# Altium PCB VESC_POWER.PcbDoc
Units mm, origin at the board's own origin, x right, y up, seen from the top; angles counter-clockwise.
Board outline 90 x 54 mm, 2 copper layers (TOP, BOTTOM), stack 1.581 mm thick; 50 components, 22 nets, 125 pads, 0 vias.
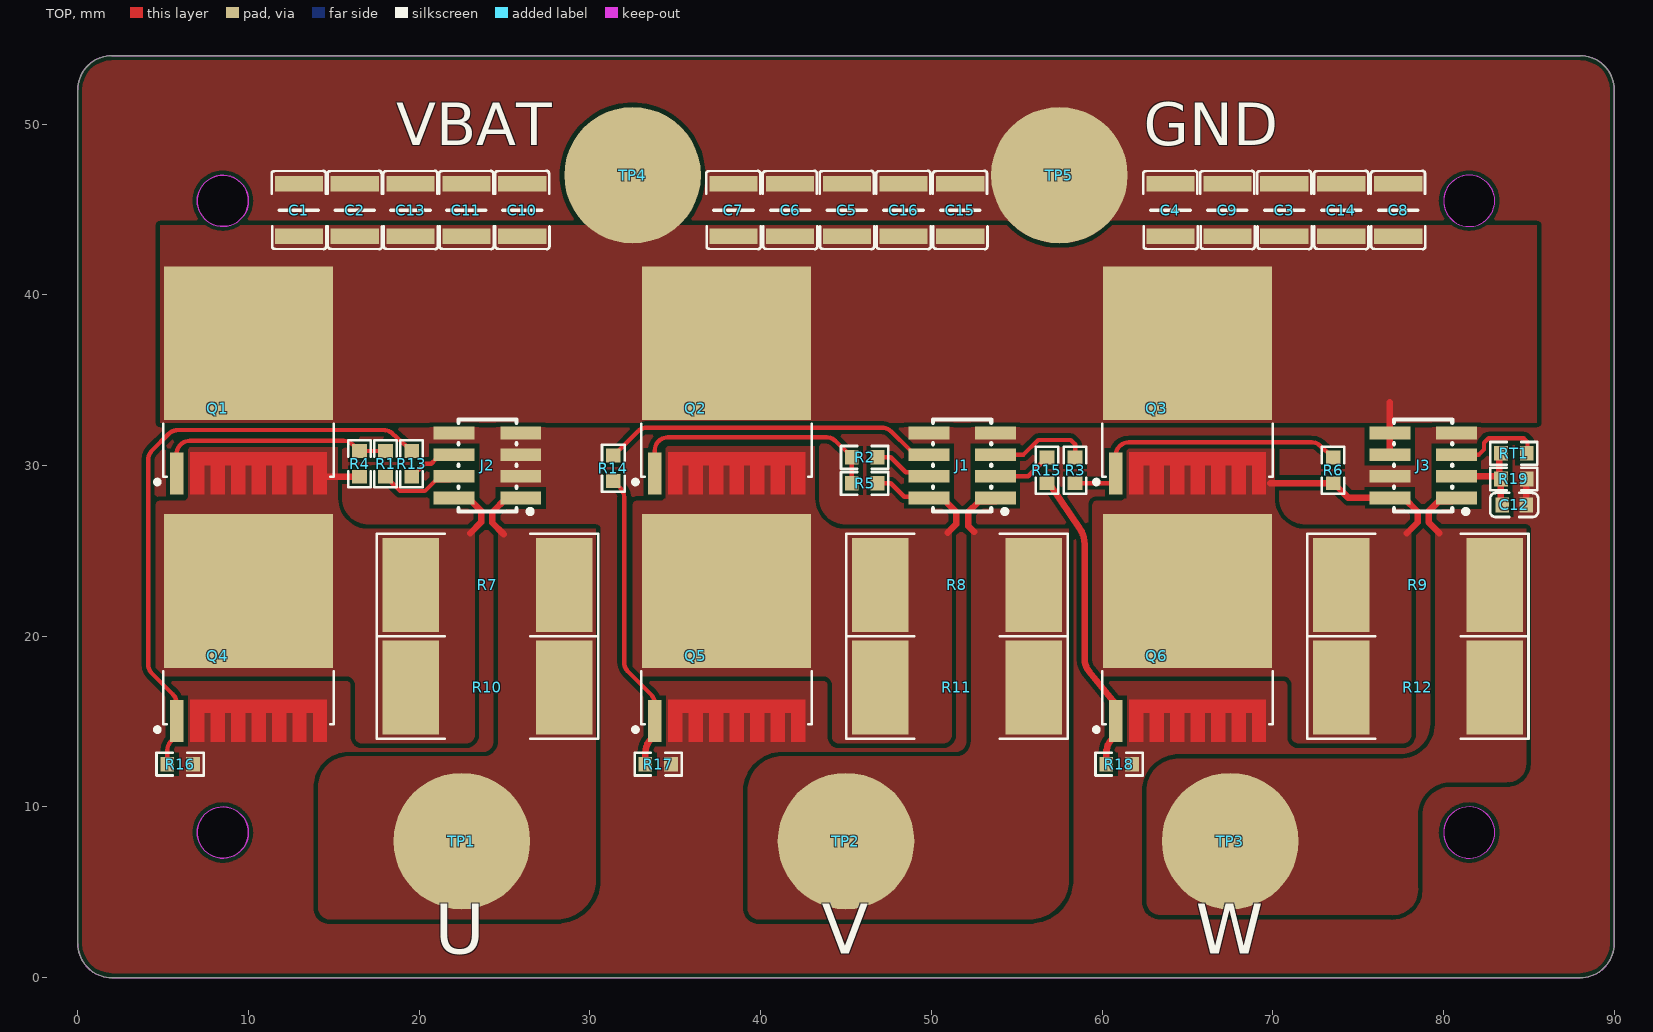
[diagram p0: TOP view]
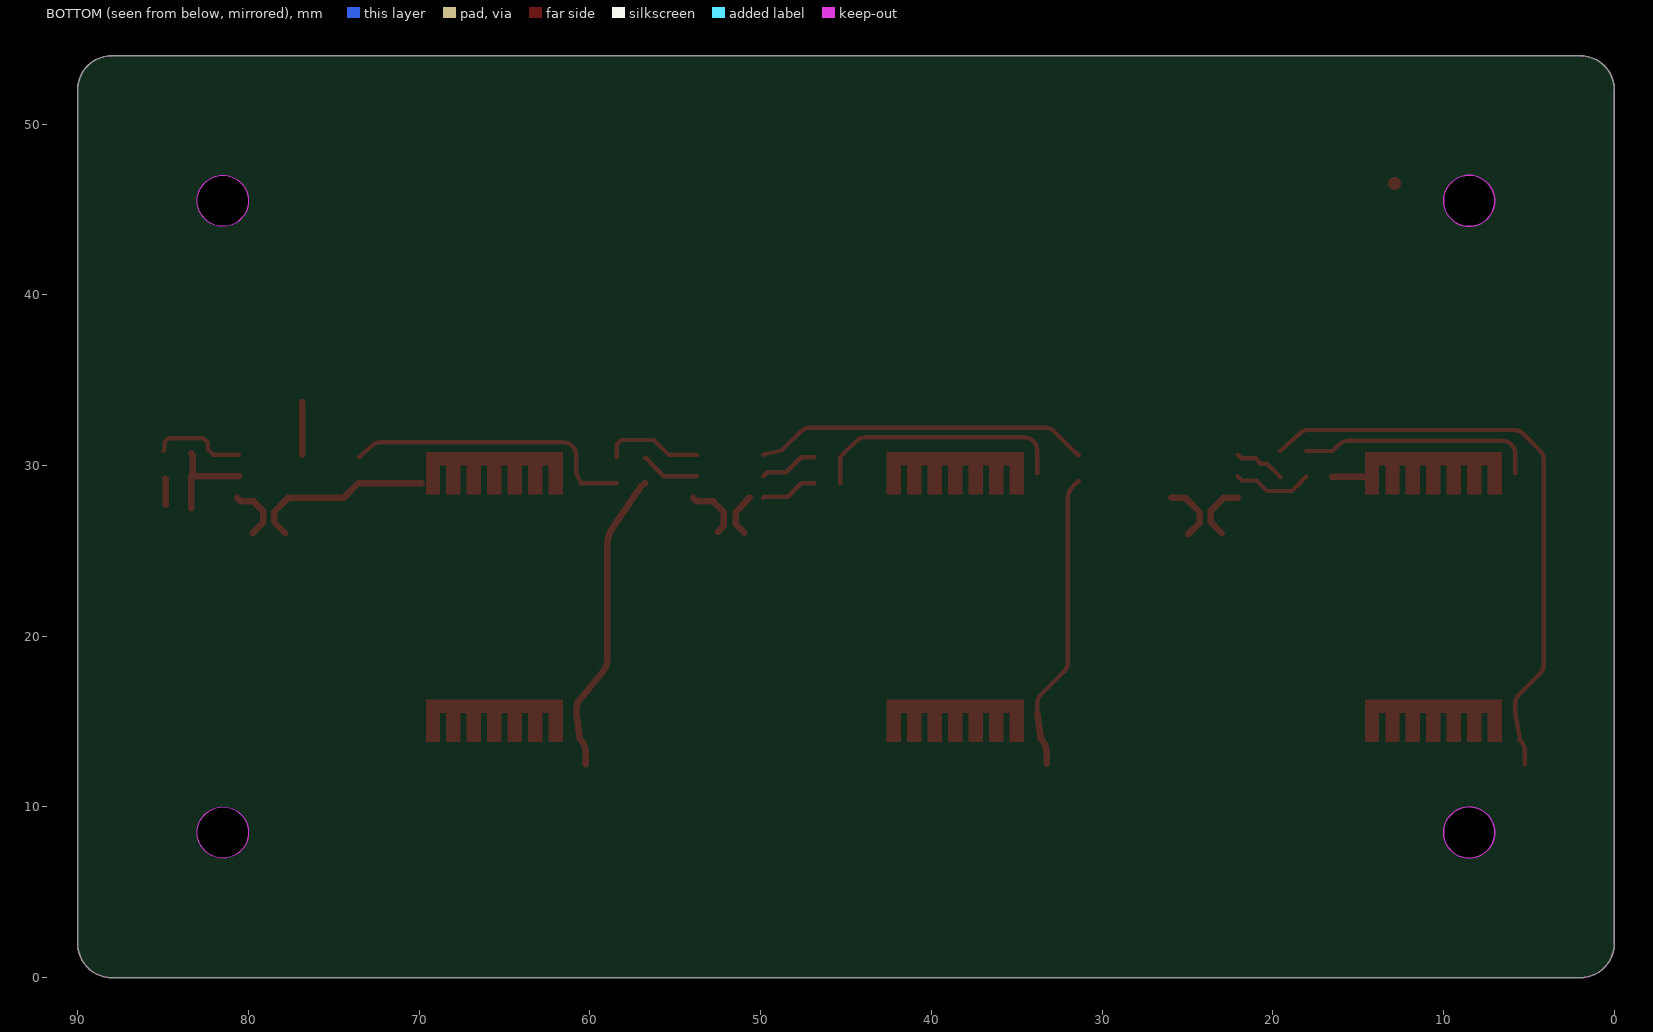
[diagram p1: BOTTOM view, seen from below]
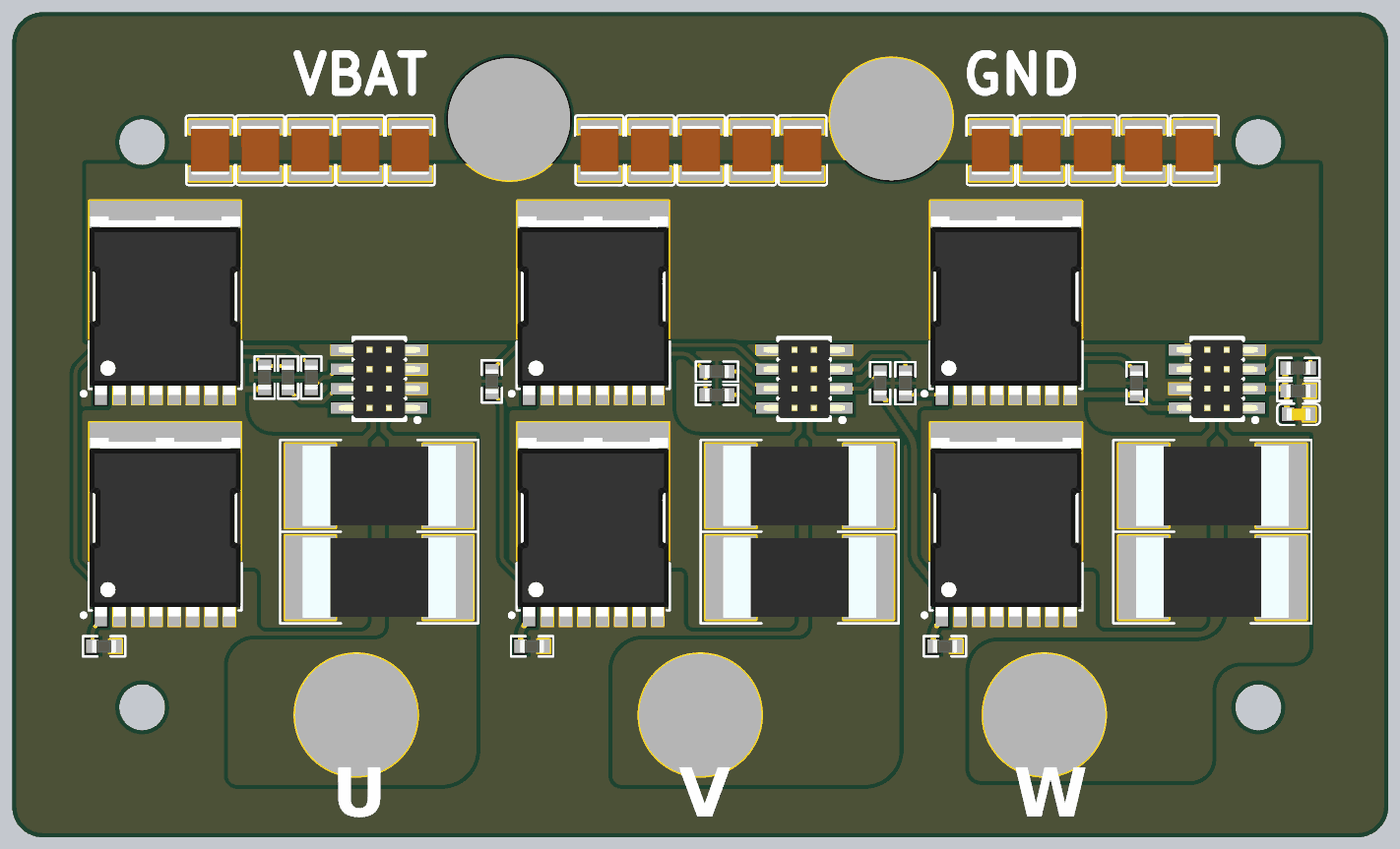
[diagram p2: 3D render of the assembled board from above, using the file's embedded part models]

## Layer stack, top to bottom
Top Solder: solder mask 0.0102, Solder Resist, Dk 3.5
TOP: signal copper 0.0305
Dielectric 1: core 1.52, FR-4, Dk 4.5
BOTTOM: signal copper 0.0305
Bottom Solder: solder mask 0.0102, Solder Resist, Dk 3.5

## Board outline
0,2 0,52 cw(c2,52) 2,54 88,54 cw(c88,52) 90,52 90,2 cw(c88,2) 88,0 2,0 cw(c2,2)
cut-out: 8.5,44 cw(c8.5,45.5) 7,45.5 cw(c8.5,45.5) 8.5,47 cw(c8.5,45.5) 10,45.5 cw(c8.5,45.5)
cut-out: 80,45.5 ccw(c81.5,45.5) 81.5,44 ccw(c81.5,45.5) 83,45.5 ccw(c81.5,45.5) 81.5,47 ccw(c81.5,45.5)
cut-out: 80,8.5 ccw(c81.5,8.5) 81.5,7 ccw(c81.5,8.5) 83,8.5 ccw(c81.5,8.5) 81.5,10 ccw(c81.5,8.5)
cut-out: 8.5,7 cw(c8.5,8.5) 7,8.5 cw(c8.5,8.5) 8.5,10 cw(c8.5,8.5) 10,8.5 cw(c8.5,8.5)

## Design rules (kind name [scope] priority, off if disabled: settings)
BoardOutlineClearance [All] p1: gap=0.254 ignorepadtopadclearanceinfootprint=FALSE except(0: Arc-SplitContinuation Track-SplitContinuation SMDPad-SplitContinuation THPad-SplitContinuation Via-SplitContinuation Fill-SplitContinuation Poly-SplitContinuation Region-SplitContinuation Text-SplitContinuation)
Clearance [All] p1: gap=0.254 ignorepadtopadclearanceinfootprint=FALSE except(0: Arc-Hole Track-Hole SMDPad-Hole THPad-Hole Via-Hole Fill-Hole Poly-Hole Region-Hole Text-Hole)
MinimumSolderMaskSliver [All] p1: minsoldermaskwidth=0.051
PlaneConnect [All] p1: planeconnectstyle=Direct reliefexpansion=0.508 reliefentries=4 reliefconductorwidth=0.254 reliefairgap=0.254
PolygonConnect [All] p1: connectstyle=Direct reliefconductorwidth=0.254 reliefentries=4 polygonreliefangle="90 Angle" airgapwidth=0.254
RoutingVias [All] p1: holewidth=0.711 width=1.27 viastyle="Through Hole" minholewidth=0.711 minwidth=1.27 maxholewidth=0.711 maxwidth=1.27
SilkToSolderMaskClearance [IsPad] p1: minsilkscreentomaskgap=0.025 clearancetoexposedcopper=TRUE
SolderMaskExpansion [All] p1: expansion=0.102 istentingtop=FALSE
SupplyNets "Schematic Supply Nets_2" [InNet('GND')] p1: voltage=0.000
SupplyNets "Schematic Supply Nets_1" [InNet('3V3')] p2: voltage=0.000
SupplyNets "Schematic Supply Nets" [InNet('VIN')] p3: voltage=0.000
Width [All] p1: maxlimit=5.08 minlimit=0.152 preferedwidth=0.254
27 further rules are at their usual default settings.

## Components (designator, comment, footprint, x,y, rotation, side; value= is the part's Value field where it differs from the comment)
C1 "2.2uF/100V" CAPC3225X230N 12.954,44.958 r270 top
C2 "2.2uF/100V" CAPC3225X230N 16.224,44.958 r270 top
C3 "2.2uF/100V" CAPC3225X230N 70.673,44.958 r270 top
C4 "2.2uF/100V" CAPC3225X230N 64.004,44.958 r270 top
C5 "2.2uF/100V" CAPC3225X230N 45.049,44.958 r270 top
C6 "2.2uF/100V" CAPC3225X230N 41.728,44.958 r270 top
C7 "2.2uF/100V" CAPC3225X230N 38.408,44.958 r270 top
C8 "2.2uF/100V" CAPC3225X230N 77.343,44.958 r270 top
C9 "2.2uF/100V" CAPC3225X230N 67.339,44.958 r270 top
C10 "2.2uF/100V" CAPC3225X230N 26.035,44.958 r270 top
C11 "2.2uF/100V" CAPC3225X230N 22.765,44.958 r270 top
C12 "2.2uF/6.3V" C0603 84.136,27.686 r0 top
C13 "2.2uF/100V" CAPC3225X230N 19.494,44.958 r270 top
C14 "2.2uF/100V" CAPC3225X230N 74.008,44.958 r270 top
C15 "2.2uF/100V" CAPC3225X230N 51.689,44.958 r270 top
C16 "2.2uF/100V" CAPC3225X230N 48.369,44.958 r270 top
J1 "X6521WVS-2x04H-C60D74" HDR-SMD_8P-P1.27-V-M-C2-C4-LS5.3 51.8,30 r90 top
J2 "X6521WVS-2x04H-C60D74" HDR-SMD_8P-P1.27-V-M-C2-C4-LS5.3 24,30 r90 top
J3 "X6521WVS-2x04H-C60D74" HDR-SMD_8P-P1.27-V-M-C2-C4-LS5.3 78.8,30 r90 top
Q1 "NCEP023N10LL" TOLL 10,35 r90 top
Q2 "NCEP023N10LL" TOLL 38,35 r90 top
Q3 "NCEP023N10LL" TOLL 65,35 r90 top
Q4 "NCEP023N10LL" TOLL 10,20.5 r90 top
Q5 "NCEP023N10LL" TOLL 38,20.5 r90 top
Q6 "NCEP023N10LL" TOLL 65,20.5 r90 top
R1 "5.1R/1%" R0603 18.034,30.099 r90 top
R2 "5.1R/1%" R0603 46.092,30.48 r180 top
R3 "5.1R/1%" R0603 58.42,29.718 r270 top
R4 "5.1K/1%" R0603 16.51,30.099 r90 top
R5 "5.1K/1%" R0603 46.092,28.956 r180 top
R6 "5.1K/1%" R0603 73.533,29.718 r90 top
R7 "1mR/1%" R3920 24,23 r180 top
R8 "1mR/1%" R3920 51.5,23 r180 top
R9 "1mR/1%" R3920 78.5,23 r180 top
R10 "1mR/1%" R3920 24,17 r180 top
R11 "1mR/1%" R3920 51.5,17 r180 top
R12 "1mR/1%" R3920 78.5,17 r180 top
R13 "5.1R/1%" R0603 19.558,30.099 r90 top
R14 "5.1R/1%" R0603 31.369,29.836 r270 top
R15 "5.1R/1%" R0603 56.769,29.718 r270 top
R16 "5.1K/1%" R0603 6,12.5 r180 top
R17 "5.1K/1%" R0603 34,12.5 r180 top
R18 "5.1K/1%" R0603 61,12.5 r180 top
R19 "10K/1%" R0603 84.116,29.212 r180 top
RT1 "NTC" R0603 84.116,30.712 r180 top
TP1 "PHA" TP_8x8 22.5,8 r0 top
TP2 "PHB" TP_8X8 45,8 r0 top locked
TP3 "PHC" TP_8x8 67.5,8 r0 top
TP4 "GND" TP_8x8 32.5,47 r0 top
TP5 "VIN" TP_8x8 57.5,47 r0 top

## Footprints (in the part's own frame and the unit in brackets; to place one, negate y for a bottom-side part, rotate by r counter-clockwise, add the part's x,y. Pads: shape width x height; smd on the part's side, far side on the other; paste and mask are expansions set on the pad)
C0603 [mm] "C0603"
  rect 0.8x0.9 smd: 1(-0.7,0) 2(0.7,0)
  silkscreen extent -1.41,-0.7 1.4,0.7, body extent -0.8,-0.41 0.8,0.41, height 0.9
CAPC3225X230N [mm]
  rect 0.92x2.82 smd: 1(-1.54,0) 2(1.54,0)
  silkscreen extent -2.3,-1.6 2.28,1.6, body extent -1.6,-1.25 1.6,1.25, height 2.47
HDR-SMD_8P-P1.27-V-M-C2-C4-LS5.3 [mm]
  rect 0.74x2.4 smd paste+0 mask+0.05: 1(-1.905,-1.95) 2(-1.905,1.95) 3(-0.635,-1.95) 4(-0.635,1.95) 5(0.635,-1.95) 6(0.635,1.95) 7(1.905,-1.95) 8(1.905,1.95)
  silkscreen extent -2.84,-2.64 2.69,1.7, body extent -2.54,-2.65 2.54,2.65, height 5.5
R0603 [mm] "R0603"
  rect 0.806x0.864 smd: 1(-0.753,0) 2(0.753,0)
  silkscreen extent -1.38,-0.66 1.39,0.66, body extent -0.79,-0.43 0.79,0.43, height 0.5
R3920 [mm] "R3920"
  rect 3.3x5.5 smd: 1(-4.5,0) 2(4.5,0)
  silkscreen extent -6.48,-3 6.48,3, body extent -5,-2.63 5,2.63, height 1.37
TOLL [mm] "TOLL"
  rect 2.463x0.8 smd: 1(-5.469,4.2)
  rect 9x9.9 smd: 2(2.15,0)
  oct 0.025x0.025 smd: 3(-5.46,-0.6)
  round 0.025 smd: 3(-5.46,-0.6)
  TOP region: -6.691,3.4 -4.228,3.4 -4.228,-4.6 -6.691,-4.6 -6.691,-3.8 -4.991,-3.8 -4.991,-3.4 -6.691,-3.4 -6.691,-2.6 -4.991,-2.6 -4.991,-2.2 -6.691,-2.2 -6.691,-1.4 -4.991,-1.4 -4.991,-1 -6.691,-1 -6.691,-0.2 -4.991,-0.2 -4.991,0.2 -6.691,0.2 -6.691,1 -4.991,1 -4.991,1.4 -6.691,1.4 -6.691,2.2 -4.991,2.2 -4.991,2.6 -6.691,2.6
  silkscreen extent -6.1,-5 -2.55,5.46, body extent -6.04,-4.95 5.63,4.95, height 2.3
TP_8x8 [mm] "TP_8X8"
  round 8 smd: 1(0,0)
TP_8X8 [mm] "TP_8X8"
  round 8 smd: 1(0,0)

## Part data
C1 C2 C3 C4 C5 C6 C7 C8 C9 C10 C11 C12 C13 C14 C15 C16: library part "CAP NP"
  C1 C2 C3 C4 C5 C6 C7 C8 C9 C10 C11 C13 C14 C15 C16: PCB Footprint=C1206
  C12: PCB Footprint=C0603
J1 J2 J3: Color=黑色, Current Rating (Max)=3A, JLCPCB Part Class="Extended Part", LCSC Part Name="2x4P 间距:2.54mm 方针", Manufacturer="XKB Connection(中国星坤)", Operating Temperature Range=-40℃~+105℃, Soldering Temperature(Max)=260℃, Voltage Rating (Max)=250V, Add into BOM=yes, Circluar Pins/Square Pins=方针, Contact Material=黄铜, Contact Plating=金, Convert to PCB=yes, Datasheet=https://atta.szlcsc.com/upload/public/pdf/source/20211009/E3239EE5247E6BAFECB8B74A4FCF9AB8.pdf, Device=X6521WVS-2x04H-C60D74, Insulation Height=2.5mm, Length of End Connection Pin=-, Length of Mating Pin=-, Manufacturer Part=X6521WVS-2x04H-C60D74, Mounting Type=-, Number of Pins=8P, Number of Rows=双排, Pin Structure=2x4P, Pitch=2.54mm, Row Spacing=2.54mm, Supplier=LCSC, Supplier Footprint=SMD,P=2.54mm, Supplier Part=C780053, Symbol=X6521WVS-2*04H-C60D74
Q1 Q2 Q3 Q4 Q5 Q6: library part "MOSFET N", PCB Footprint=TOLL
R1 R2 R3 R4 R5 R6 R7 R8 R9 R10 R11 R12 R13 R14 R15 R16 R17 R18 R19: library part RESISTOR
  R1 R2 R3 R4 R5 R6 R13 R14 R15 R16 R17 R18 R19: PCB Footprint=R0603
  R7 R8 R9 R10 R11 R12: PCB Footprint=R3920
TP1 TP2 TP3 TP4 TP5: library part "TEST POINT", PCB Footprint=TP_8x8
RT1: PCB Footprint=R0603

## Nets (pads, with @x,y where several pads share a name; then routed paths per layer and width w, separated by ;. In a path a pad name is that pad's centre, name@x,y a point inside that pad or via, vN(x,y) a via of type N, cw(c..) or ccw(c..) an arc to the next point about the centre after c; other vN are vias at no path point)
3V3: J3.5 RT1.1 | length 5.6
  TOP w0.254: J3.5@80.55,30.635 82.07,30.635 82.369,30.934 82.369,31.329 82.639,31.6 84.691,31.6 84.915,31.376 84.915,30.909 RT1.1@84.963,30.861
ADC_TEMP: C12.1 J3.3 R19.2 RT1.2 | length 6
  TOP w0.381: J3.3@80.55,29.365 83.21,29.365 R19.2 C12.1@83.363,27.492 ; R19.2@83.344,29.365 83.255,29.453 83.255,30.604 RT1.2
GHA: J2.4 R1.1 | length 4.7
  TOP w0.254: R1.1 18.063,29.346 18.339,29.07 18.339,29.041 18.878,28.502 20.334,28.502 20.955,29.122 21.807,29.122 J2.4
GHB: J1.4 R2.1 | length 3.5
  TOP w0.254: R2.1 47.625,30.48 48.497,29.608 49.607,29.608 J1.4
GHC: J1.5 R3.1 | length 5.9
  TOP w0.254: J1.5 55.4,30.635 56.261,31.496 58.166,31.496 58.42,31.242 R3.1
GLA: J2.6 R13.1 | length 3
  TOP w0.254: R13.1 19.587,29.346 20.34,30.099 20.701,30.099 20.977,30.375 20.977,30.392 21.007,30.422 21.837,30.422 J2.6
GLB: J1.6 R14.1 | length 19.7
  TOP w0.254: R14.1 31.674,30.865 32.803,31.994 cw(c33.342,31.455) 33.342,32.217 47.096,32.217 cw(c47.096,31.455) 47.629,32 48.777,30.878 J1.6
GLC: J1.3 R15.1 | length 3.5
  TOP w0.254: J1.3 55.672,29.365 56.464,30.157 56.464,30.195 56.731,30.462 R15.1@56.769,30.462
GND: C1.1 C2.1 C3.1 C4.1 C5.1 C6.1 C7.1 C8.1 C9.1 C10.1 C11.1 C12.2 C13.1 C14.1 C15.1 C16.1 J1.7 J1.8 J2.3 J2.5 J2.7 J2.8 J3.4 J3.7 Q4.3 Q5.3 Q6.3 R16.1 R17.1 R18.1 R19.1 TP5.1 | length 1.5
  TOP w0.381: C12.2 84.836,29.179 R19.1
NetQ1_1: Q1.1 R1.2 R4.2 | length 14
  TOP w0.254: Q1.1 5.8,30.683 cw(c6.562,30.683) 6.562,31.445 15.572,31.445 cw(c15.572,30.683) 16.05,31.276 16.234,31.128 R4.2 17.729,30.852 R1.2
NetQ2_1: Q2.1 R2.2 R5.2 | length 15.3
  TOP w0.254: Q2.1 33.8,30.886 cw(c34.562,30.886) 34.027,31.428 cw(c34.564,30.888) 34.564,31.65 43.853,31.65 cw(c43.853,30.888) 44.379,31.439 45.063,30.785 R2.2 R5.2
NetQ3_1: Q3.1 R3.2 R6.2 | length 17.3
  TOP w0.254: R3.2 60.527,28.965 Q3.1 60.801,30.636 cw(c61.562,30.594) 61.562,31.356 72.262,31.356 cw(c72.262,30.594) 72.773,31.159 73.228,30.747 R6.2
NetQ4_1: Q4.1 R13.2 R16.2 | length 35.3
  TOP w0.254: R16.2 5.247,13.313 cw(c6.009,13.313) 5.421,13.798 5.527,13.926 5.8,15.531 5.795,16.135 5.779,16.211 ccw(c5.034,16.051) 5.572,16.59 4.352,17.81 cw(c4.892,18.348) 4.13,18.348 4.13,30.336 cw(c4.892,30.336) 4.353,30.875 5.336,31.857 cw(c5.874,31.318) 5.874,32.08 17.907,32.08 cw(c17.907,31.318) 18.418,31.883 19.253,31.128 R13.2
NetQ5_1: Q5.1 R14.2 R17.2 | length 17.6
  TOP w0.254: R14.2 31.674,28.807 31.831,28.616 cw(c31.242,28.132) 32.004,28.132 32.004,18.474 ccw(c32.766,18.474) 32.227,17.936 33.577,16.585 cw(c33.038,16.047) 33.795,16.136 Q5.1@33.8,15.531
  TOP w0.381: R17.2@33.247,12.529 33.247,13.173 cw(c34.39,13.173) 33.582,13.981 33.59,13.99 Q5.1@33.8,15.531
NetQ6_1: Q6.1 R15.2 R18.2 | length 17.9
  TOP w0.381: R15.2 57.011,28.771 58.696,26.301 cw(c57.348,25.383) 58.697,26.3 cw(c57.348,25.383) 58.979,25.383 58.979,18.657 ccw(c60.122,18.657) 59.236,17.935 60.754,16.072 60.8,15.531 60.59,13.99 60.514,13.899 ccw(c61.39,13.165) 60.247,13.165 R18.2
PHA: J2.1 R7.1 R10.1 TP1.1 | length 3.6
  TOP w0.381: 24.945,25.982 24.284,26.643 24.284,27.259 25.12,28.095 J2.1
PHB: J1.1 R8.1 R11.1 TP2.1 | length 3.5
  TOP w0.381: 52.507,26.106 52.165,26.448 52.165,27.273 52.74,27.848 52.74,27.915 53.77,27.915 J1.1@53.95,28.095
PHC: J3.1 R9.1 R12.1 TP3.1 | length 3.4
  TOP w0.381: 79.756,26.035 79.121,26.67 79.121,27.305 79.731,27.915 80.47,27.915 J3.1@80.65,28.095
SHA: J2.2 Q1.3 Q4.2 R4.1 R7.2 R10.2 | length 5.4
  TOP w0.381: 14.605,29.337 14.614,29.346 R4.1 ; J2.2 22.88,28.095 23.622,27.353 23.622,26.67 22.987,26.035
SHB: J1.2 Q2.3 Q5.2 R5.1 R8.2 R11.2 | length 5.9
  TOP w0.254: R5.1 47.625,28.956 48.418,28.163 49.782,28.163 J1.2
  TOP w0.381: J1.2@50.645,28.095 50.68,28.095 50.86,27.915 50.86,27.88 51.45,27.29 51.45,26.558 50.96,26.068
SHC: J3.2 Q3.3 Q6.2 R6.1 R9.2 R12.2 | length 10.8
  TOP w0.381: 69.85,28.956 69.859,28.965 R6.1 ; R6.1@73.533,28.956 73.571,28.956 74.432,28.095 J3.2 77.68,28.095 78.486,27.289 78.486,26.67 77.851,26.035
VIN: C1.2 C2.2 C3.2 C4.2 C5.2 C6.2 C7.2 C8.2 C9.2 C10.2 C11.2 C13.2 C14.2 C15.2 C16.2 J3.6 J3.8 Q1.2 Q2.2 Q3.2 TP4.1 | length 3.1
  TOP w0.381: J3.6 76.85,33.708

## Polygon pours and split planes (outlines as drawn)
GND on TOP "GND" (solid, pour order 15): 0,2 0,52 cw(c2,52) 2,54 88,54 cw(c88,52) 90,52 90,2 cw(c88,2) 88,0 2,0 cw(c2,2)
VIN on TOP "VIN_L01_P011" (solid, pour order 11): 4.826,32.512 4.826,44.069 85.471,44.069 85.471,32.512
PHC on TOP "PHC_L01_P012" (solid, pour order 12): 79.502,26.289 84.836,26.289 84.836,12.675 cw(c83.731,12.555) 83.693,11.444 cw(c82.048,397.756) 80.402,11.444 ccw(c80.394,9.537) 78.487,9.532 cw(c-821.093,7.677) 78.486,5.334 cw(c77.021,5.148) 76.835,3.683 63.373,3.683 cw(c63.373,4.445) 62.611,4.445 62.611,10.922 cw(c64.516,10.922) 64.516,12.827 77.475,12.827 ccw(c77.475,14.854) 79.502,14.854
SHA on TOP "SHA_L01_P008" (solid, pour order 8): 6.477,31.115 6.477,28.194 cw(c6.223,28.194) 6.223,27.94 4.826,27.94 ccw(c4.826,27.686) 4.572,27.686 4.572,18.161 ccw(c5.08,18.161) 5.08,17.653 15.738,17.653 cw(c15.738,17.135) 16.256,17.135 16.256,14.097 ccw(c16.637,14.097) 16.637,13.716 22.733,13.716 ccw(c22.733,14.224) 23.241,14.224 23.241,26.289 17.018,26.289 cw(c17.018,28.067) 15.24,28.067 15.24,31.115
SHC on TOP "SHC_L01_P014" (solid, pour order 14): 61.341,31.115 61.341,28.194 cw(c61.087,28.194) 61.087,27.94 59.69,27.94 ccw(c59.69,27.686) 59.436,27.686 59.436,18.161 ccw(c59.944,18.161) 59.944,17.653 70.602,17.653 cw(c70.602,17.135) 71.12,17.135 71.12,14.097 ccw(c71.501,14.097) 71.501,13.716 77.597,13.716 ccw(c77.597,14.224) 78.105,14.224 78.105,26.289 71.882,26.289 cw(c71.882,28.067) 70.104,28.067 70.104,31.115
SHB on TOP "SHB_L01_P013" (solid, pour order 13): 34.417,31.115 34.417,28.194 cw(c34.163,28.194) 34.163,27.94 32.766,27.94 ccw(c32.766,27.686) 32.512,27.686 32.512,18.161 ccw(c33.02,18.161) 33.02,17.653 43.678,17.653 cw(c43.678,17.135) 44.196,17.135 44.196,14.097 ccw(c44.577,14.097) 44.577,13.716 50.673,13.716 ccw(c50.673,14.224) 51.181,14.224 51.181,26.289 44.958,26.289 cw(c44.958,28.067) 43.18,28.067 43.18,31.115
PHB on TOP "PHB_L01_P005" (solid, pour order 5): 52.324,26.289 58.039,26.289 58.039,5.715 cw(c55.753,5.715) 55.753,3.429 39.878,3.429 cw(c39.878,4.064) 39.243,4.064 39.243,10.922 cw(c41.275,10.922) 41.275,12.954 51.435,12.954 ccw(c51.435,13.843) 52.324,13.843
PHA on TOP "PHA_L01_P003" (solid, pour order 3): 24.638,26.289 30.353,26.289 30.353,5.715 cw(c28.067,5.715) 28.067,3.429 14.732,3.429 cw(c14.732,4.064) 14.097,4.064 14.097,11.176 cw(c15.875,11.176) 15.875,12.954 23.749,12.954 ccw(c23.749,13.843) 24.638,13.843

## Keep-outs
Keep-Out Layer:
  circle w0.013: c8.5,45.5 r1.5
  circle w0.013: c81.5,45.5 r1.5
  circle w0.013: c81.5,8.5 r1.5
  circle w0.013: c8.5,8.5 r1.5
  lines w0.025: 0,2 ccw(c2,2) 2,0 88,0 ccw(c88,2) 90,2 90,52 ccw(c88,52) 88,54 2,54 ccw(c2,52) 0,52 0,2

## Silkscreen, mask and mechanical layers (free items; w line width, h text height)
Top Overlay:
  text "VBAT" at 18.659,48.75 h2.5
  text "GND" at 62.454,48.75 h2.5
  text "U" at 20.907,0.442 h5
  text "V" at 43.586,0.442 h5
  text "W" at 65.482,0.442 h5
DRAWING_ORIGIN:
  lines w0.025: -0.635,0 0.635,0 ; 0,-0.635 0,0.635

## Text inside footprints (layer, text, board x,y; h text height)
C12: PIN_NUMBER "1" at 83.182,27.686 h0.64; PIN_NUMBER "2" at 84.582,27.686 h0.64
Q1: PIN_NUMBER "2" at 10.762,37.15 h0.64 r180; PIN_NUMBER "3" at 10.392,29.05 h0.64 r90; PIN_NUMBER "1" at 5.592,29.15 h0.64 r90
Q2: PIN_NUMBER "2" at 38.762,37.15 h0.64 r180; PIN_NUMBER "3" at 38.392,29.05 h0.64 r90; PIN_NUMBER "1" at 33.592,29.15 h0.64 r90
Q3: PIN_NUMBER "1" at 60.592,29.15 h0.64 r90; PIN_NUMBER "3" at 65.392,29.05 h0.64 r90; PIN_NUMBER "2" at 65.762,37.15 h0.64 r180
Q4: PIN_NUMBER "2" at 10.762,22.65 h0.64 r180; PIN_NUMBER "3" at 10.392,14.55 h0.64 r90; PIN_NUMBER "1" at 5.592,14.65 h0.64 r90
Q5: PIN_NUMBER "1" at 33.592,14.65 h0.64 r90; PIN_NUMBER "3" at 38.392,14.55 h0.64 r90; PIN_NUMBER "2" at 38.762,22.65 h0.64 r180
Q6: PIN_NUMBER "1" at 60.592,14.65 h0.64 r90; PIN_NUMBER "3" at 65.392,14.55 h0.64 r90; PIN_NUMBER "2" at 65.762,22.65 h0.64 r180
R1: PIN_NUMBER "2" at 18.234,31.607 h0.64 r90; PIN_NUMBER "1" at 18.234,30.007 h0.64 r90
R2: PIN_NUMBER "2" at 44.584,30.68 h0.64 r180; PIN_NUMBER "1" at 46.184,30.68 h0.64 r180
R3: PIN_NUMBER "1" at 58.22,29.81 h0.64 r270; PIN_NUMBER "2" at 58.22,28.21 h0.64 r270
R4: PIN_NUMBER "2" at 16.71,31.607 h0.64 r90; PIN_NUMBER "1" at 16.71,30.007 h0.64 r90
R5: PIN_NUMBER "1" at 46.184,29.156 h0.64 r180; PIN_NUMBER "2" at 44.584,29.156 h0.64 r180
R6: PIN_NUMBER "2" at 73.733,31.226 h0.64 r90; PIN_NUMBER "1" at 73.733,29.626 h0.64 r90
R7: PIN_NUMBER "1" at 28.3,22.592 h0.64 r180; PIN_NUMBER "2" at 19.3,22.592 h0.64 r180
R8: PIN_NUMBER "2" at 46.8,22.592 h0.64 r180; PIN_NUMBER "1" at 55.8,22.592 h0.64 r180
R9: PIN_NUMBER "1" at 82.8,22.592 h0.64 r180; PIN_NUMBER "2" at 73.8,22.592 h0.64 r180
R10: PIN_NUMBER "2" at 19.3,16.592 h0.64 r180; PIN_NUMBER "1" at 28.3,16.592 h0.64 r180
R11: PIN_NUMBER "1" at 55.8,16.592 h0.64 r180; PIN_NUMBER "2" at 46.8,16.592 h0.64 r180
R12: PIN_NUMBER "2" at 73.8,16.592 h0.64 r180; PIN_NUMBER "1" at 82.8,16.592 h0.64 r180
R13: PIN_NUMBER "1" at 19.758,30.007 h0.64 r90; PIN_NUMBER "2" at 19.758,31.607 h0.64 r90
R14: PIN_NUMBER "2" at 31.169,28.328 h0.64 r270; PIN_NUMBER "1" at 31.169,29.928 h0.64 r270
R15: PIN_NUMBER "1" at 56.569,29.81 h0.64 r270; PIN_NUMBER "2" at 56.569,28.21 h0.64 r270
R16: PIN_NUMBER "2" at 4.492,12.7 h0.64 r180; PIN_NUMBER "1" at 6.092,12.7 h0.64 r180
R17: PIN_NUMBER "1" at 34.092,12.7 h0.64 r180; PIN_NUMBER "2" at 32.492,12.7 h0.64 r180
R18: PIN_NUMBER "2" at 59.492,12.7 h0.64 r180; PIN_NUMBER "1" at 61.092,12.7 h0.64 r180
R19: PIN_NUMBER "1" at 84.208,29.412 h0.64 r180; PIN_NUMBER "2" at 82.608,29.412 h0.64 r180
RT1: PIN_NUMBER "1" at 84.208,30.912 h0.64 r180; PIN_NUMBER "2" at 82.608,30.912 h0.64 r180
TP1: PIN_NUMBER "1" at 20.722,8 h0.64
TP2: PIN_NUMBER "1" at 43.222,8 h0.64
TP3: PIN_NUMBER "1" at 65.722,8 h0.64
TP4: PIN_NUMBER "1" at 30.722,47 h0.64
TP5: PIN_NUMBER "1" at 55.722,47 h0.64